# Altium PCB PCB1 MK1.PcbDoc
Units mil, origin at the board's own origin, x right, y up, seen from the top; angles counter-clockwise.
Board outline 5745 x 4490 mil, 2 copper layers (Top Layer, Bottom Layer); 17 components, 38 nets, 80 pads, 0 vias.
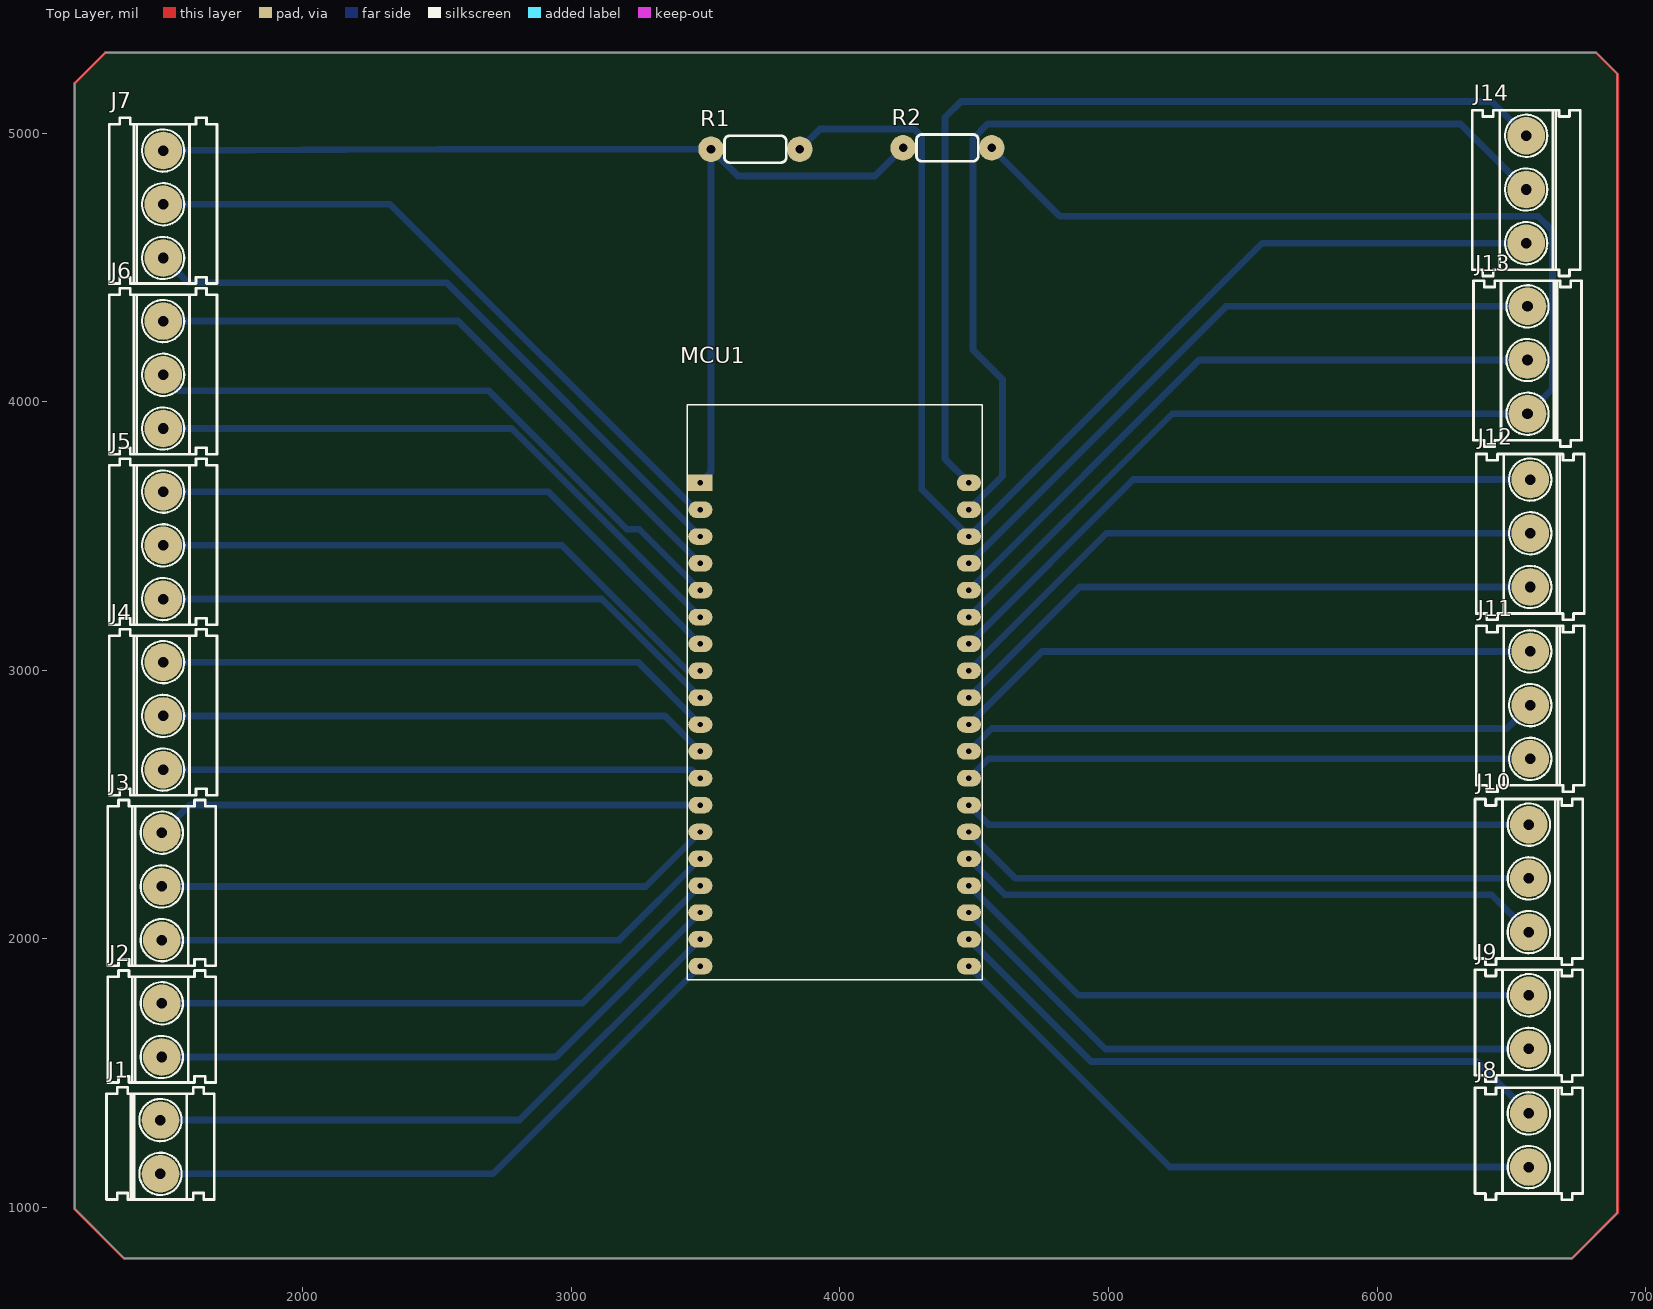
[diagram p0: Top Layer view]
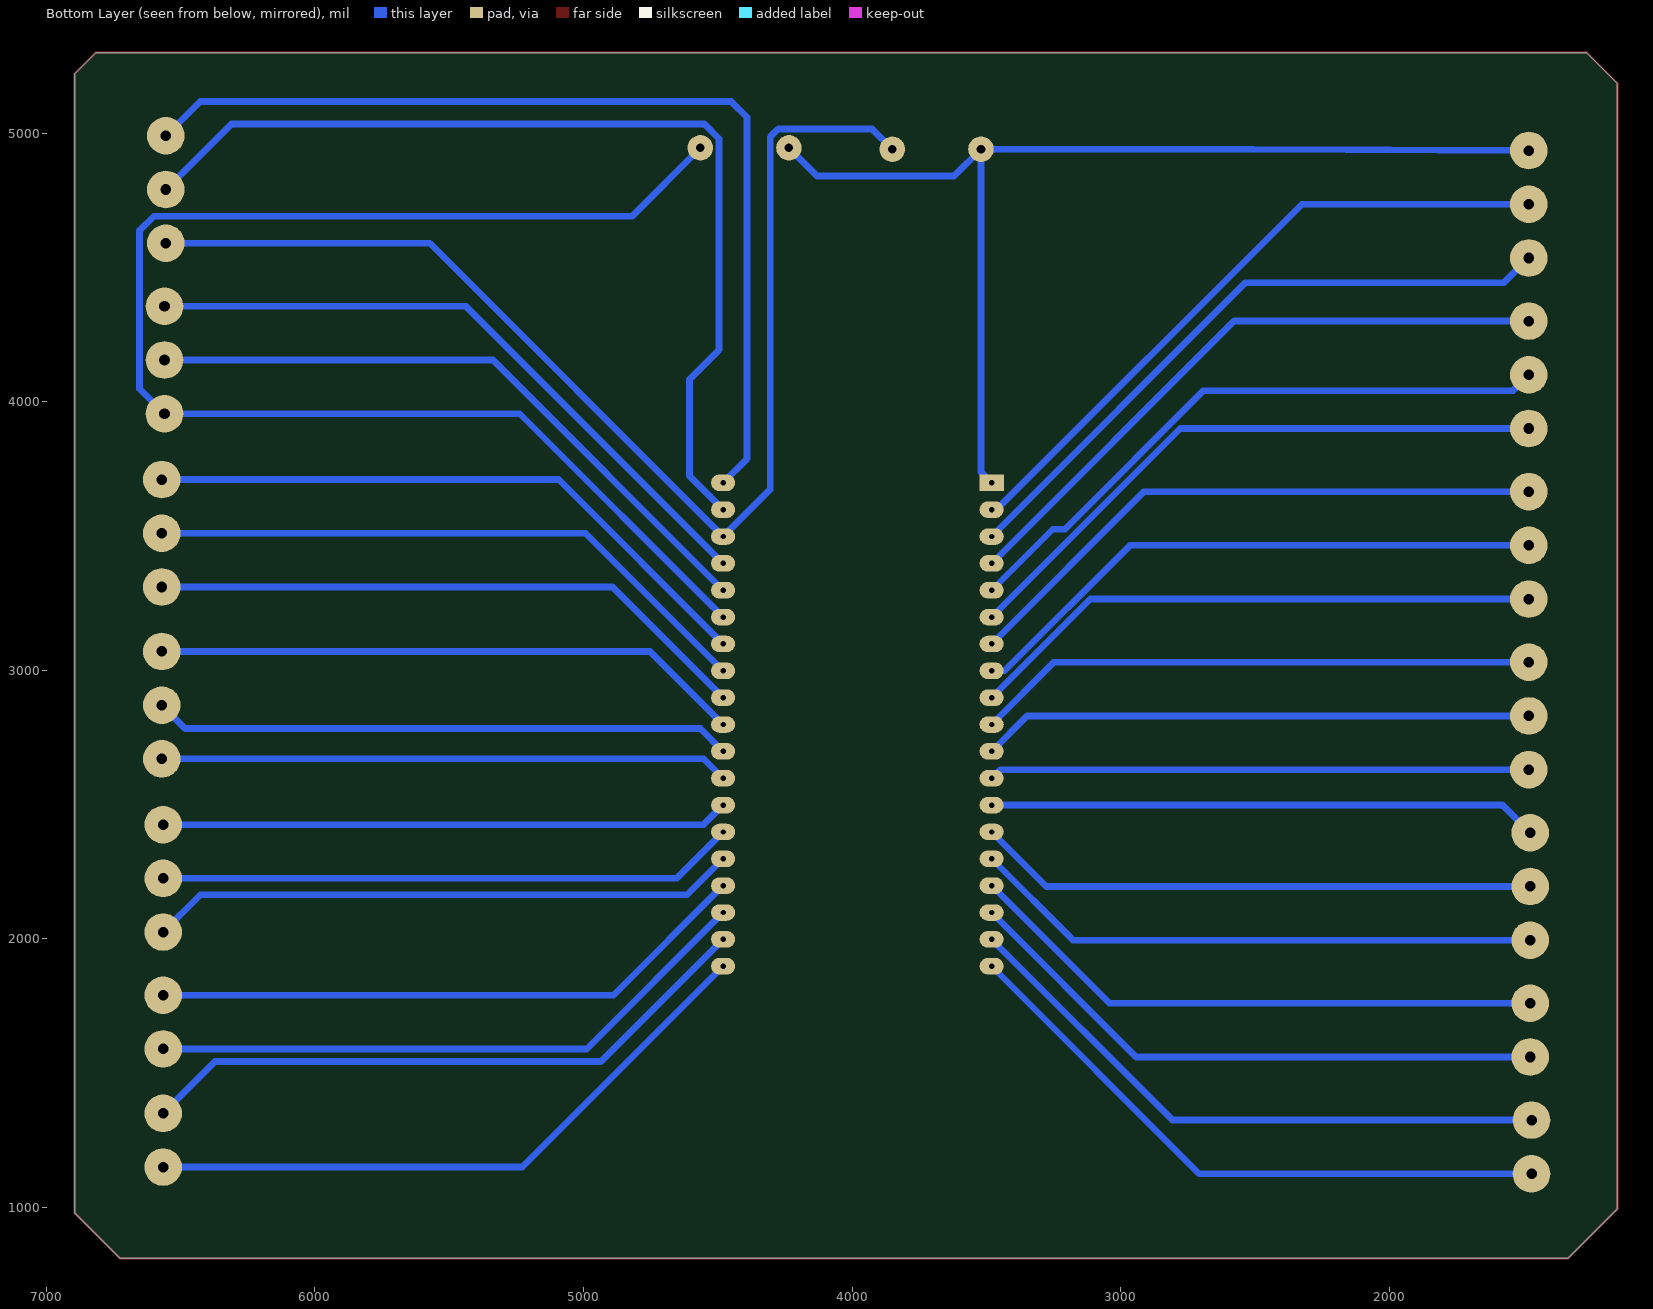
[diagram p1: Bottom Layer view, seen from below]
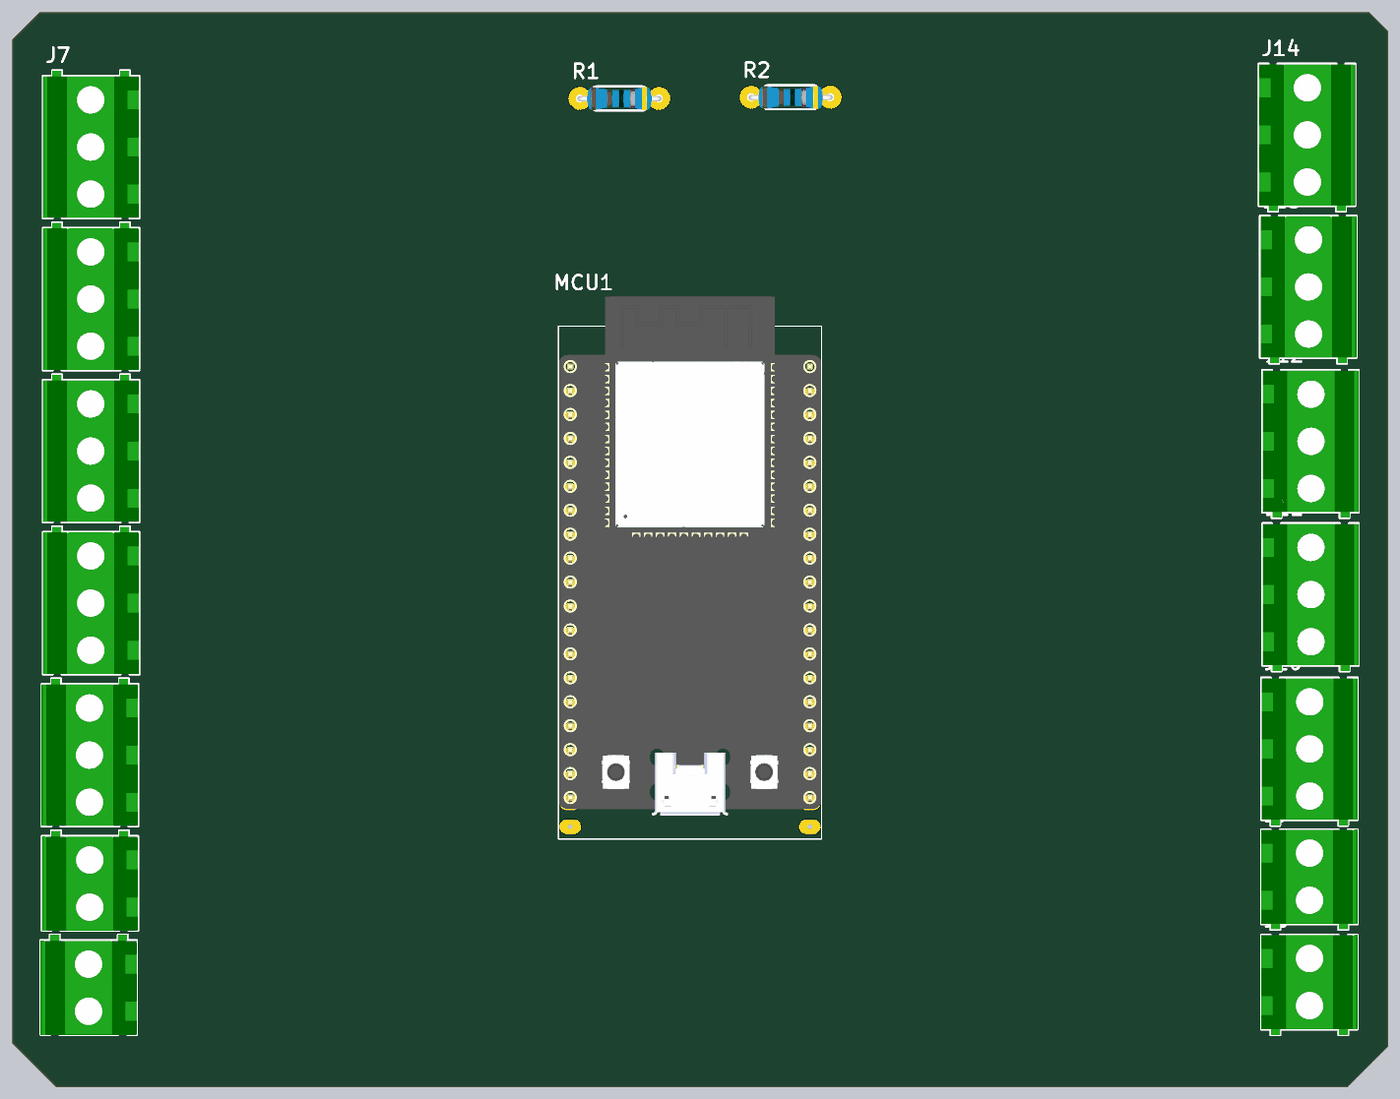
[diagram p2: 3D render of the assembled board from above, using the file's embedded part models]

## Layer stack, top to bottom
Top Solder: solder mask 0.4, Solder Resist, Dk 3.5
Top Layer: signal copper 1.4
Dielectric 1: dielectric 12.6, FR-4, Dk 4.8
Bottom Layer: signal copper 1.4
Bottom Solder: solder mask 0.4, Solder Resist, Dk 3.5

## Board outline
1150,995 1150,5185 1265,5300 6815,5300 6895,5220 6895,980 6725,810 1335,810

## Design rules (kind name [scope] priority, off if disabled: settings)
Clearance [All] p1: gap=10 ignorepadtopadclearanceinfootprint=FALSE except(0: Arc-Hole Track-Hole SMDPad-Hole THPad-Hole Via-Hole Fill-Hole Poly-Hole Region-Hole Text-Hole)
PolygonConnect [All] p1: connectstyle=Relief reliefconductorwidth=10 reliefentries=4 polygonreliefangle="90 Angle" airgapwidth=10
RoutingLayers [All] p1: top layer_v5=FALSE bottom layer_v5=TRUE
RoutingVias [All] p1: holewidth=28 width=50 viastyle="Through Hole" minholewidth=28 minwidth=50 maxholewidth=28 maxwidth=50
SolderMaskExpansion [All] p1: expansion=4
Width [All] p1: maxlimit=30 minlimit=20 preferedwidth=25 minimp=50.000000 maximp=50.000000 favimp=50.000000
29 further rules are at their usual default settings.

## Components (designator, comment, footprint, x,y, rotation, side; value= is the part's Value field where it differs from the comment)
J1 "" "TB_200Mil 2 P" 1470,1325 r270 top
J2 "" "TB_200Mil 2 P" 1475,1760 r270 top
J3 "" "TB_200Mil 3 P" 1475,2395 r270 top
J4 "" "TB_200Mil 3 P" 1480,3030 r270 top
J5 "" "TB_200Mil 3 P" 1480,3665 r270 top
J6 "" "TB_200Mil 3 P" 1480,4300 r270 top
J7 "" "TB_200Mil 3 P" 1480,4935 r270 top
J8 "" "TB_200Mil 2 P" 6565,1150 r90 top
J9 "" "TB_200Mil 2 P" 6565,1590 r90 top
J10 "" "TB_200Mil 3 P" 6565,2025 r90 top
J11 "" "TB_200Mil 3 P" 6570,2670 r90 top
J12 "" "TB_200Mil 3 P" 6570,3310 r90 top
J13 "" "TB_200Mil 3 P" 6560,3955 r90 top
J14 "" "TB_200Mil 3 P" 6555,4590 r90 top
MCU1 "ESP32-DEVKITC-32D" MODULE_ESP32-DEVKITC-32D 3980,2920 r0 top
R1 "4.7K" 4.7K 3850,4940 r180 top
R2 "4.7K" 4.7K 4565,4945 r180 top

## Footprints (in the part's own frame and the unit in brackets; to place one, negate y for a bottom-side part, rotate by r counter-clockwise, add the part's x,y. Pads: shape width x height; smd on the part's side, far side on the other; paste and mask are expansions set on the pad)
4.7K [mil]
  round 95 hole 32: 1(0,0) 2(330,0)
  silkscreen extent 50,-50 280,50, body extent -47,-48 377,50, height 38
MODULE_ESP32-DEVKITC-32D [mil]
  rect 90x61.42 hole 20: 1(-500,777.95)
  oval 90x61.42 hole 20: 2(-500,677.95) 3(-500,577.95) 4(-500,477.95) 5(-500,377.95) 6(-500,277.95) 7(-500,177.95) 8(-500,77.95) 9(-500,-22.05) 10(-500,-122.05) 11(-500,-222.05) 12(-500,-322.05) 13(-500,-422.05) 14(-500,-522.05) 15(-500,-622.05) 16(-500,-722.05) 17(-500,-822.05) 18(-500,-922.05) 19(-500,-1022.05) 20(500,777.95) 21(500,677.95) 22(500,577.95) 23(500,477.95) 24(500,377.95) 25(500,277.95) 26(500,177.95) 27(500,77.95) 28(500,-22.05) 29(500,-122.05) 30(500,-222.05) 31(500,-322.05) 32(500,-422.05) 33(500,-522.05) 34(500,-622.05) 35(500,-722.05) 36(500,-822.05) 37(500,-922.05) 38(500,-1022.05)
  silkscreen extent -549,-1073 549,1069, body extent -550,-976 550,1193, height 128
"TB_200Mil 2 P" [mil]
  round 140 hole 39.37: 1(0,0) 2(200,0)
  silkscreen extent -122,-201 295,201, body extent -121,-202 296,200, height 551
"TB_200Mil 3 P" [mil]
  round 140 hole 39.37: 1(0,0) 2(200,0) 3(400,0)
  silkscreen extent -122,-201 495,201, body extent -121,-203 493,199, height 551

## Part data
J1 J2 J8 J9: library part "TB 2 PIN"
J3 J4 J5 J6 J7 J10 J11 J12 J13 J14: library part "TB 3 PIN"
MCU1: "EVAL BOARD FOR ESP-WROOM-32", Package=None, Availability=Warning, Check_prices=https://www.snapeda.com/parts/ESP32-DEVKITC-32D/Espressif%20Systems/view-part/2777395/?ref=eda, MF="Espressif Systems", MP=ESP32-DEVKITC-32D, Price=None, Purchase-URL=https://pricing.snapeda.com/search/part/ESP32-DEVKITC-32D/?ref=eda, SnapEDA_Link=https://www.snapeda.com/parts/ESP32-DEVKITC-32D/Espressif%20Systems/view-part/2777395/?ref=snap

## Nets (pads, with @x,y where several pads share a name; then routed paths per layer and width w, separated by ;. In a path a pad name is that pad's centre, name@x,y a point inside that pad or via, vN(x,y) a via of type N, cw(c..) or ccw(c..) an arc to the next point about the centre after c; other vN are vias at no path point)
NetJ1_1: J1.1 MCU1.18 | length 2288.7
  Bottom Layer w25: J1.1 2807.05,1325 MCU1.18
NetJ1_2: J1.2 MCU1.19 | length 2330.2
  Bottom Layer w25: J1.2 2707.05,1125 MCU1.19
NetJ2_1: J2.1 MCU1.16 | length 2186.4
  Bottom Layer w25: J2.1 3042.05,1760 MCU1.16
NetJ2_2: J2.2 MCU1.17 | length 2227.8
  Bottom Layer w25: J2.2 2942.05,1560 MCU1.17
NetJ3_1: J3.1 MCU1.13 | length 2047.6
  Bottom Layer w25: J3.1 1577.95,2497.95 MCU1.13
NetJ3_2: J3.2 MCU1.14 | length 2089.1
  Bottom Layer w25: J3.2 3277.05,2195 MCU1.14
NetJ3_3: J3.3 MCU1.15 | length 2130.5
  Bottom Layer w25: J3.3 3177.05,1995 MCU1.15
NetJ4_1: J4.1 MCU1.10 | length 2096.1
  Bottom Layer w25: J4.1 3247.95,3030 MCU1.10
NetJ4_2: J4.2 MCU1.11 | length 2054.7
  Bottom Layer w25: J4.2 3347.95,2830 MCU1.11
NetJ4_3: J4.3 MCU1.12 | length 2013.3
  Bottom Layer w25: J4.3 3447.95,2630 MCU1.12
NetJ5_1: J5.1 MCU1.7 | length 2234.9
  Bottom Layer w25: J5.1 2912.95,3665 MCU1.7
NetJ5_2: J5.2 MCU1.8 | length 2193.5
  Bottom Layer w25: J5.2 2965.27,3465 3432.32,2997.95 MCU1.8
NetJ5_3: J5.3 MCU1.9 | length 2152
  Bottom Layer w25: J5.3 3112.95,3265 MCU1.9
NetJ6_1: J6.1 MCU1.4 | length 2373.6
  Bottom Layer w25: J6.1 2577.95,4300 MCU1.4
NetJ6_2: J6.2 MCU1.5 | length 2332.2
  Bottom Layer w25: J6.2 1539,4041 2691.03,4041 3206.94,3525.08 3252.87,3525.08 MCU1.5
NetJ6_3: J6.3 MCU1.6 | length 2290.8
  Bottom Layer w25: J6.3 2777.95,3900 MCU1.6
NetJ7_1: J7.1 MCU1.1 R1.2 R2.2 | length 4098.5
  Bottom Layer w25: J7.1 2505,4940 R1.2 ; MCU1.1 3520,3737.95 R1.2 ; R2.2 4130,4840 3620,4840 R1.2
NetJ7_2: J7.2 MCU1.2 | length 2471
  Bottom Layer w25: J7.2 2325,4735 3462.05,3597.95 MCU1.2
NetJ7_3: J7.3 MCU1.3 | length 2429.6
  Bottom Layer w25: J7.3 1572,4443 2534.95,4443 MCU1.3
NetJ8_1: J8.1 MCU1.38 | length 2394.8
  Bottom Layer w25: MCU1.38 5227.95,1150 J8.1
NetJ8_2: J8.2 MCU1.37 | length 2353.4
  Bottom Layer w25: MCU1.37 4934.95,1543 6372,1543 J8.2
NetJ9_1: J9.1 MCU1.36 | length 2295.4
  Bottom Layer w25: MCU1.36 4987.95,1590 J9.1
NetJ9_2: J9.2 MCU1.35 | length 2254
  Bottom Layer w25: MCU1.35 4887.95,1790 J9.2
NetJ10_1: J10.1 MCU1.34 | length 2198.1
  Bottom Layer w25: MCU1.34 4613.95,2164 6426,2164 J10.1
NetJ10_2: J10.2 MCU1.33 | length 2156.6
  Bottom Layer w25: MCU1.33 4652.95,2225 J10.2
NetJ10_3: J10.3 MCU1.32 | length 2115.2
  Bottom Layer w25: MCU1.32 4552.95,2425 J10.3
NetJ11_1: J11.1 MCU1.31 | length 2119.8
  Bottom Layer w25: MCU1.31 4552.05,2670 J11.1
NetJ11_2: J11.2 MCU1.30 | length 2161.3
  Bottom Layer w25: MCU1.30 4565.05,2783 6483,2783 J11.2
NetJ11_3: J11.3 MCU1.29 | length 2202.7
  Bottom Layer w25: MCU1.29 4752.05,3070 J11.3
NetJ12_1: J12.1 MCU1.28 | length 2260.7
  Bottom Layer w25: MCU1.28 4892.05,3310 J12.1
NetJ12_2: J12.2 MCU1.27 | length 2302.1
  Bottom Layer w25: MCU1.27 4992.05,3510 J12.2
NetJ12_3: J12.3 MCU1.26 | length 2343.5
  Bottom Layer w25: MCU1.26 5092.05,3710 J12.3
NetJ13_1: J13.1 MCU1.25 R2.1 | length 5329.7
  Bottom Layer w25: MCU1.25 5237.05,3955 J13.1 6653,4048 6653,4637 6600,4690 4820,4690 R2.1
NetJ13_2: J13.2 MCU1.24 | length 2435
  Bottom Layer w25: MCU1.24 5337.05,4155 J13.2
NetJ13_3: J13.3 MCU1.23 | length 2476.4
  Bottom Layer w25: MCU1.23 5437.05,4355 J13.3
NetJ14_1: J14.1 MCU1.22 R1.1 | length 4585.4
  Bottom Layer w25: R1.1 3925,5015 4275,5015 4305,4985 4305,3672.95 MCU1.22 5572.05,4590 J14.1
NetJ14_2: J14.2 MCU1.21 | length 3662.2
  Bottom Layer w25: MCU1.21 4605,3722.95 4605,4083 4495,4193 4495,4979 4550,5034 6311,5034 J14.2
NetJ14_3: J14.3 MCU1.20 | length 3639.4
  Bottom Layer w25: MCU1.20 4391,3786.95 4391,5059 4450,5118 6427,5118 J14.3
copper on no net: | length 20147.8
  Top Layer w10: 1150,995 1335,810 6725,810 6895,980 6895,5220 6815,5300 1265,5300 1150,5185 1150,995

## Dimensions
6815,5300 to 6725,810 on Top Layer
1150,5185 to 6895,5220 on Top Layer